# Altium PCB DoPro PCB.PcbDoc
Units mil, origin at the board's own origin, x right, y up, seen from the top; angles counter-clockwise.
Board outline 3495.51 x 2204.72 mil, 2 copper layers (Top Layer, Bottom Layer); 43 components, 31 nets, 155 pads, 59 vias.
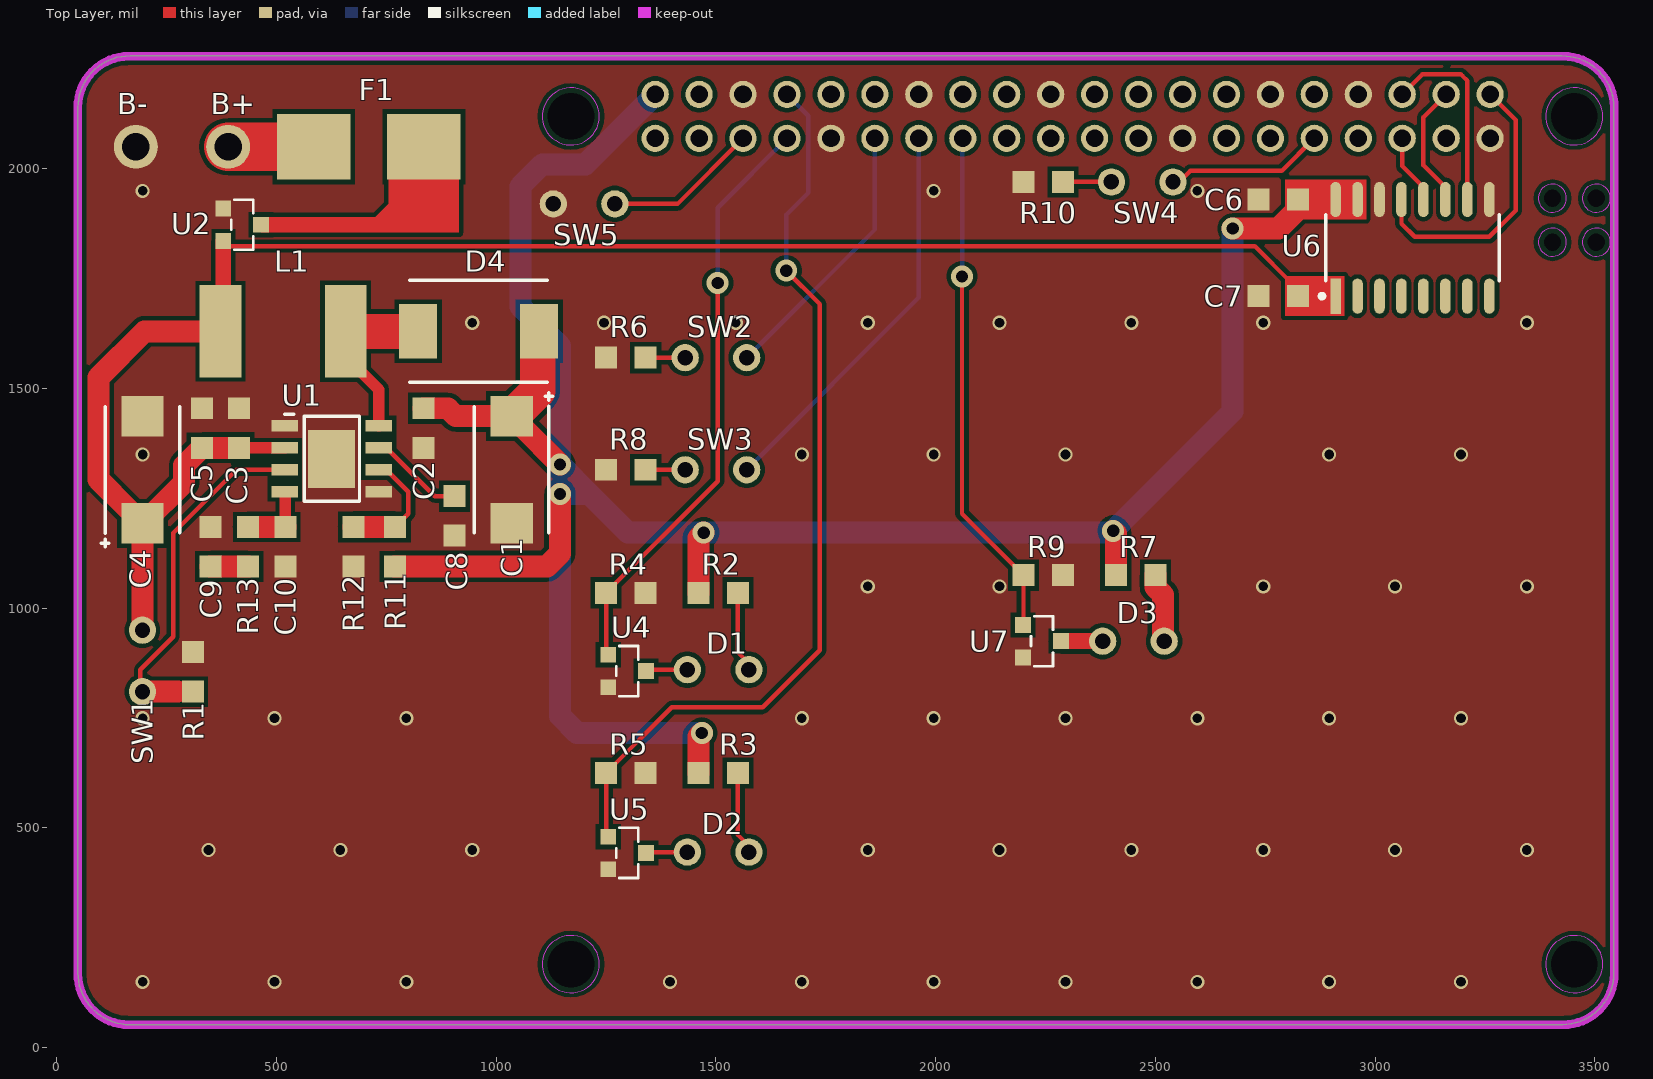
[diagram p0: Top Layer view]
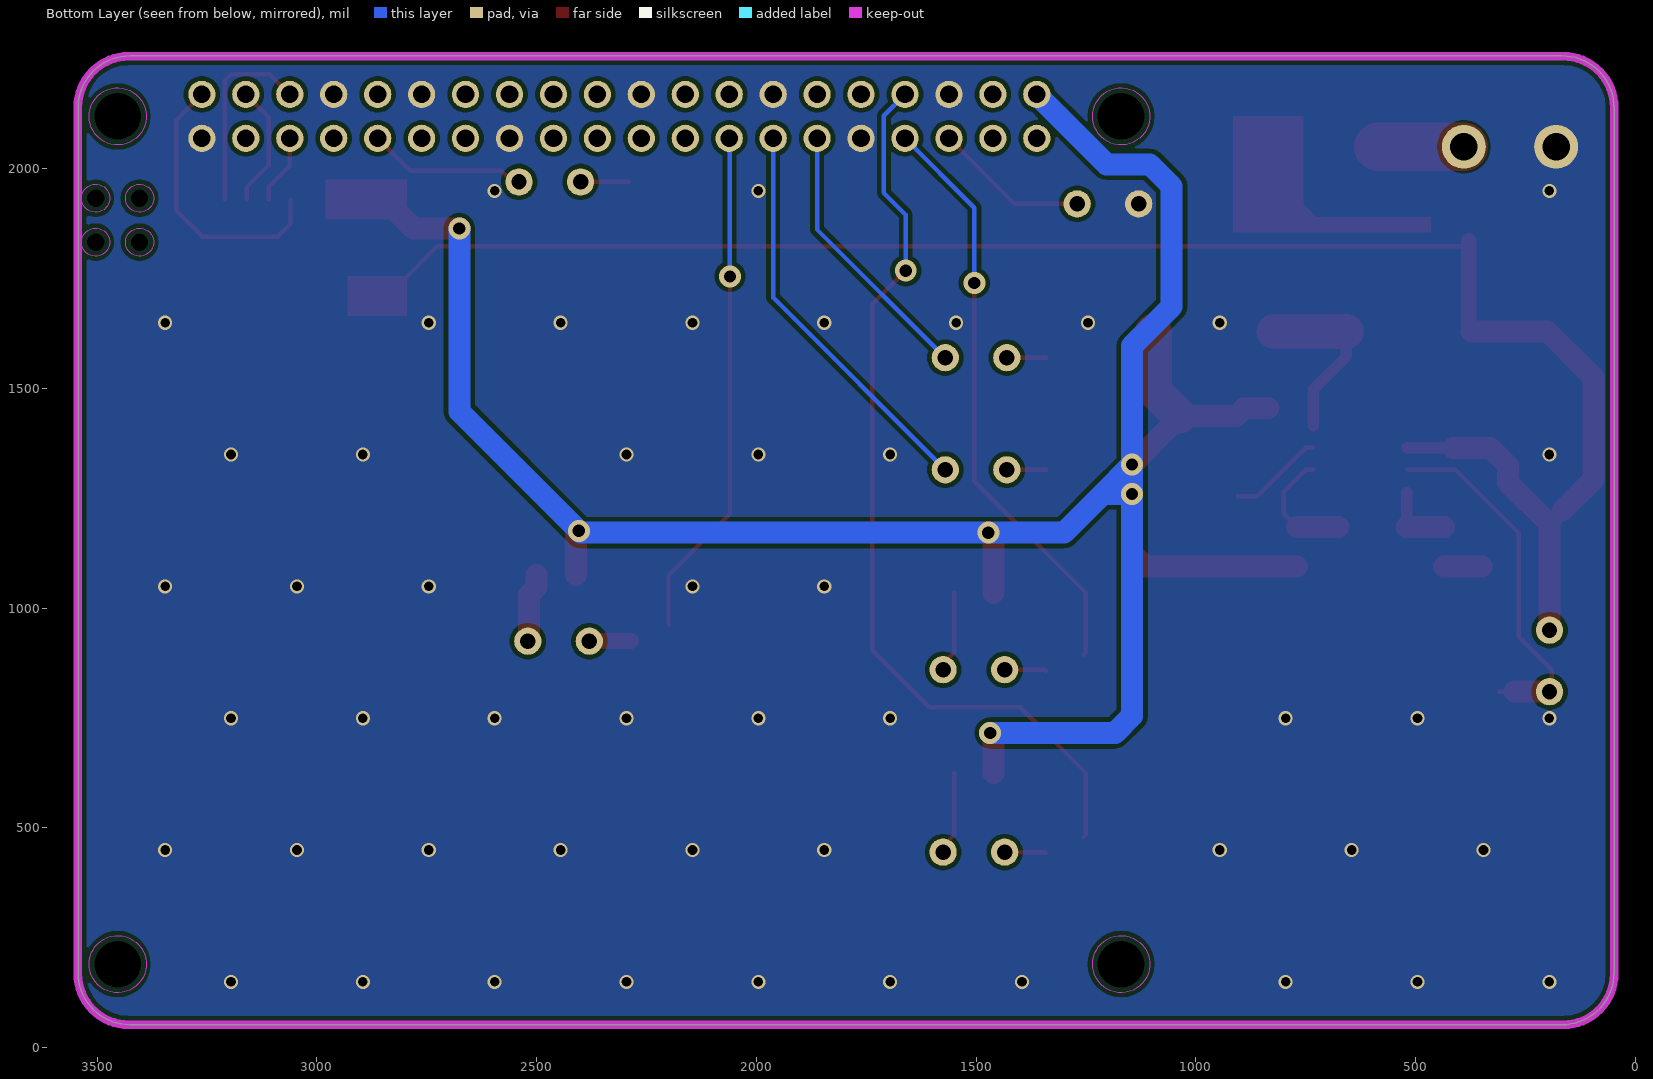
[diagram p1: Bottom Layer view, seen from below]

## Layer stack, top to bottom
Top Solder: solder mask 0.4, Solder Resist, Dk 3.5
Top Layer: signal copper 1.4
Dielectric 1: dielectric 12.6, FR-4, Dk 4.8
Bottom Layer: signal copper 1.4
Bottom Solder: solder mask 0.4, Solder Resist, Dk 3.5

## Board outline
47.95,170.31 47.95,2138.82 cw(c166.06,2138.82) 166.06,2256.93 3425.35,2256.93 cw(c3425.35,2138.82) 3543.46,2138.82 3543.46,170.31 cw(c3425.35,170.31) 3425.35,52.2 166.06,52.2 cw(c166.06,170.31)

## Design rules (kind name [scope] priority, off if disabled: settings)
Clearance [All] p1: gap=10 ignorepadtopadclearanceinfootprint=TRUE
HoleSize [All] p1: absolutevalues=TRUE maxlimit=200 minlimit=1 maxpercent=80.000 minpercent=20.000
PolygonConnect [All] p1: connectstyle=Direct reliefconductorwidth=10 reliefentries=4 polygonreliefangle="90 Angle" airgapwidth=10
RoutingVias [All] p1: holewidth=28 width=50 viastyle="Through Hole" minholewidth=22 minwidth=32 maxholewidth=28 maxwidth=50
SolderMaskExpansion SolderMaskExpansionVias [IsVia] p1: expansion=4 istentingtop=TRUE
SolderMaskExpansion [All] p2: expansion=4 istentingtop=FALSE
Width [All] p1: maxlimit=110 minlimit=5 preferedwidth=10
29 further rules are at their usual default settings.

## Classes and differential pairs
component class "DoPro Schematic": B+ B- C5 C6 C7 D1 D2 D3 F1 L1 R1 R2 R3 R4 R5 R6 R7 R8 R9 R10 SW1 SW2 SW3 SW4 SW5 U2 U4 U5 U6 U7

## Components (designator, comment, footprint, x,y, rotation, side; value= is the part's Value field where it differs from the comment)
B+ "Vbat+" Test_Point_100D#1 353.91,2050 r0 top (schematic designator TP1)
B- "Vbat-" Test_Point_100D#2 180,2055 r0 top (schematic designator TP2)
C1 "470uF" SMD_7343 1035,1315 r270 top
C2 "10uF" SMD_0805 835,1410 r270 top
C3 "1uF" SMD_0805 415,1410 r90 top
C4 "470uF" SMD_7343 195,1315 r90 top
C5 "10uF" SMD_0805 330,1410 r90 top
C6 "1uF" SMD_0805 2780,1930 r0 top
C7 "10uF" SMD_0805 2780,1710 r180 top
C8 "10nF" SMD_0805 905,1210 r270 top
C9 "2.2nF" SMD_0805 350,1140 r90 top
C10 "47pF" SMD_0805 520,1140 r270 top
D1 "GREEN_LED" Test_Point_2_62D 1505,860 r0 top
D2 "RED_LED" Test_Point_2_62D 1505,445 r0 top
D3 "MP-1616-1100-50-80" Test_Point_2_62D 2450,925 r0 top
D4 "Schottky_Diode" SMD_SMC_DO-214AB 960,1630 r180 top
F1 "01550900M" Littelfuse_154_OMNI-BLOK 710,2050 r0 top
L1 "1uH" Vishay_IHLP-3232DZ-11 515,1630 r0 top
R1 "1M" SMD_0805 310,855 r90 top
R2 "330" SMD_0805 1505,1035 r0 top
R3 "330" SMD_0805 1505,625 r0 top
R4 "2K" SMD_0805 1295,1035 r0 top
R5 "2K" SMD_0805 1295,625 r0 top
R6 "10K" SMD_0805 1295,1570 r0 top
R7 "12" SMD_0805 2455,1075 r0 top
R8 "10K" SMD_0805 1295,1315 r0 top
R9 "2K" SMD_0805 2245,1075 r0 top
R10 "10K" SMD_0805 2245,1970 r0 top
R11 "30.9K" SMD_0805 770,1140 r90 top
R12 "10K" SMD_0805 675,1140 r270 top
R13 "51K" SMD_0805 435,1140 r270 top
SW1 "Switch" Test_Point_2_62D 195,880 r270 top
SW2 "SEL1" Test_Point_2_62D 1500,1570 r0 top
SW3 "SEL2" Test_Point_2_62D 1500,1315 r0 top
SW4 "Capture" Test_Point_2_62D 2470,1970 r0 top
SW5 "Power Button" Test_Point_2_62D 1200,1920 r0 top
U1 "PAM2423AECADJR" SMD_SO-8EP 519.17,1415 r0 top
U2 "AO3415A" SMD_SOT-23 379,1909.5 r270 top
U3 "Raspberry Pi 4" RPI_Connections 1361.73,2069.13 r0 top
U4 "IRLML2803" SMD_SOT-23 1255,894 r270 top
U5 "IRLML2803" SMD_SOT-23 1255,480 r270 top
U6 "MCP3008" SMD_16-SOIC 3085,1820 r90 top
U7 "IRLML2803" SMD_SOT-23 2199,962 r270 top

## Footprints (in the part's own frame and the unit in brackets; to place one, negate y for a bottom-side part, rotate by r counter-clockwise, add the part's x,y. Pads: shape width x height; smd on the part's side, far side on the other; paste and mask are expansions set on the pad)
Littelfuse_154_OMNI-BLOK [mil]
  rect 167x150 smd: 1(-125.5,0) 2(125.5,0)
RPI_Connections [mil]
  round 62 hole 40.16: 1(0,0) 2(0,100) 3(100,0) 4(100,100) 5(200,0) 6(200,100) 7(300,0) 8(300,100) 9(400,0) 10(400,100) 11(500,0) 12(500,100) 13(600,0) 14(600,100) 15(700,0) 16(700,100) 17(800,0) 18(800,100) 19(900,0) 20(900,100) 21(1000,0) 22(1000,100) 23(1100,0) 24(1100,100) 25(1200,0) 26(1200,100) 27(1300,0) 28(1300,100) 29(1400,0) 30(1400,100) 31(1500,0) 32(1500,100) 33(1600,0) 34(1600,100) 35(1700,0) 36(1700,100) 37(1800,0) 38(1800,100) 39(1900,0) 40(1900,100)
SMD_16-SOIC [mil]
  rect 80x24 smd: 1(-110,175)
  oval 80x24 smd: 2(-110,125) 3(-110,75) 4(-110,25) 5(-110,-25) 6(-110,-75) 7(-110,-125) 8(-110,-175) 9(110,-175) 10(110,-125) 11(110,-75) 12(110,-25) 13(110,25) 14(110,75) 15(110,125) 16(110,175)
  silkscreen extent -116,-197 75,212
SMD_0805 [mil]
  rect 50x50 smd: 1(-45,0) 2(45,0)
SMD_7343 [mm]
  rect 2.35x2.45 smd: 1(-3.1,0) 2(3.1,0)
  silkscreen extent -4.46,-2.15 3.65,2.38, body extent -3.59,-2.21 3.6,2.21, height 2.92
SMD_SMC_DO-214AB [mm]
  rect 2.2x3.15 smd: 1(-3.5,0) 2(3.5,0)
  silkscreen extent -3.97,-2.95 3.97,2.95, body extent -3.97,-2.95 3.97,2.95, height 2.62
SMD_SO-8EP [mm]
  rect 1.525x0.65 smd: 1(0,0) 2(0,-1.27) 3(0,-2.54) 4(0,-3.81) 5(5.424,-3.81) 6(5.424,-2.54) 7(5.424,-1.27) 8(5.424,0)
  rect 2.71x3.35 smd: 9(2.688,-1.905)
  silkscreen extent 0,-4.36 4.31,0.67, body extent -0.29,-4.36 5.71,0.55, height 1.75
SMD_SOT-23 [mil]
  rect 36x36 smd: 1(0,0) 2(74,0) 3(37,86)
  silkscreen extent -20,18 94,68
Test_Point_2_62D [mil]
  round 62 hole 35: 1(-70,0) 2(70,0)
Test_Point_100D#1 [mil]
  round 100 hole 62: 1(36.09,0)
Test_Point_100D#2 [mil]
  round 100 hole 62: 1(0,-5)
Vishay_IHLP-3232DZ-11 [mil]
  rect 95x210 smd: 1(-142.5,0) 2(142.5,0)

## Part data
B+ B-: library part Test_Point
C1 C4: library part Capacitor_Polarized
C2 C3 C5 C6 C7 C8 C9 C10: library part Capacitor
D1 D2 D3: library part LED
F1: library part Fuse_ZAYA, "Holder: 01550900M        Fuse: 0454005.MR", Rating=5A
L1: library part Inductor, "IHLP3232DZER1R0M11"
R1 R2 R3 R4 R5 R6 R7 R8 R9 R10 R11 R12 R13: library part RESISTOR_4_DOUG
  R7: P/N=ERJ-P06J120V
SW2 SW3 SW4 SW5: library part Button
U2: library part AO3415A_ZAYA
U4 U5 U7: library part IRLML2803_ZAYA
U6: library part MCP3008_ZAYA

## Free pads (board coordinates)
  round 60 hole 106.3 unplated: 1(1170,190) 1(1170,2119.13) 1(3453.46,190) 1(3453.46,2119.13)
  round 30 hole 39.37 unplated: 1(3403.46,1832.91) 1(3403.46,1932.91) 1(3503.46,1832.91) 1(3503.46,1932.91)

## Via types
v1: diameter 32, hole 22, Top Layer to Bottom Layer, tented both sides, 50 vias
v2: diameter 50, hole 28, Top Layer to Bottom Layer, tented both sides, 9 vias

## Nets (pads, with @x,y where several pads share a name; then routed paths per layer and width w, separated by ;. In a path a pad name is that pad's centre, name@x,y a point inside that pad or via, vN(x,y) a via of type N, cw(c..) or ccw(c..) an arc to the next point about the centre after c; other vN are vias at no path point)
3V6: C3.1 C4.1 C5.1 C7.1 L1.1 SW1.1 U1.2 U2.2 U6.1 | length 4030.8
  Top Layer w10: U2.2@379,1824 2726,1824 2810,1740
  Top Layer w25.5: C3.1 U1.2
  Top Layer w36: C4.1@164.77,1223.18 164.77,1221.21 193.03,1192.95 C4.1 ; L1.1 379,1636.5 379,1824 U2.2
  Top Layer w50: C4.1@164.77,1223.18 95,1292.95 95,1525 200,1630 L1.1 ; SW1.1 C4.1 196.97,1192.95 290,1285.98 290,1325 C5.1 C3.1
5V1: C1.1 C2.1 C6.2 D4.1 R2.1 R3.1 R7.1 R11.1 U3.2 U6.15 U6.16 | length 5773.1
  Top Layer w50: R11.1 1115.71,1095 1145,1124.29 v2(1145,1260) ; C2.1 890,1455 907.95,1437.05 C1.1 1036.97,1437.05 1058.23,1415.79 1058.23,1413.82 v2(1145,1327.05) ; R3.1 1460,708 v2(1468,716) ; R2.1 1460,1160 v2(1472,1172) ; v2(2404,1176) 2410,1170 R7.1 ; v2(2676,1864) 2780,1864 2820,1904
  Top Layer w80: C1.1@1036.97,1437.05 1094.49,1494.57 1094.49,1626.69 D4.1
  Bottom Layer w50: U3.2 1361.73,2168.74 1202.99,2010 1105,2010 1055,1960 1055,1686.69 1145,1596.69 v2(1145,1327.05) ; v2(1468,716) 1184,716 1145,755 v2(1145,1260) ; v2(2676,1864) 2676,1448 v2(2404,1176) 2400,1172 v2(1472,1172) 1300.05,1172 1212.05,1260 ; v2(1145,1260) v2(1145,1327.05) ; v2(1145,1260) 1212.05,1260 ; v2(1145,1327.05) 1212.05,1260
Capture: SW4.2 U3.31 | length 362.8
  Top Layer w10: SW4.2 2554.07,1970 2579.07,1995 2787.6,1995 U3.31
CS: U3.36 U6.10 | length 443.5
  Top Layer w10: U3.36 3107.6,2215 3155,2215 cw(c3158.5,2169.13) 3159.88,2215.11 ccw(c3160.12,2225.11) 3160.36,2215.11 cw(c3161.73,2169.13) 3164.97,2215.02 ccw(c3165.59,2225) 3165.51,2215 3195,2215 3197.93,2212.07 3210,2200 U6.10
Flash: R9.1 U3.15 U7.1 | length 1166.3
  Top Layer w10: v2(2060,1755) 2060,1215 R9.1 2200,963 U7.1
  Bottom Layer w10: v2(2060,1755) 2060.87,1755.87 2060.87,2068.27 U3.15
LED1: R4.1 U3.7 U4.1 | length 1347.8
  Top Layer w10: U4.1 1250,899 R4.1 1504,1289 v2(1504,1740)
  Bottom Layer w10: v2(1504,1740) 1504,1911.4 U3.7
MISO: U3.35 U6.12 | length 159.1
  Top Layer w10: U3.35 3061.73,2006.27 3110,1958 U6.12
MOSI: U3.38 U6.11 | length 281.3
  Top Layer w10: U6.11 3160,1958 3110,2008 3110,2117.4 U3.38
NetC8_1: C8.1 U1.7 | length 217.8
  Top Layer w10: U1.7 749.94,1365 859.94,1255 C8.1
NetC9_1: C9.1 R13.2 | length 85
  Top Layer w50: C9.1 R13.2
NetC10_1: C10.1 R13.1 U1.4 | length 165.3
  Top Layer w10: U1.4 U1.4@520,1264.17
  Top Layer w25.5: C10.1 U1.4@520,1264.17
  Top Layer w50: R13.1 C10.1
NetD1_ANOD: D1.2 R2.2 | length 185.4
  Top Layer w10: R2.2 1550,899.07 1575,874.07 D1.2
NetD1_CATH: D1.1 U4.3 | length 95.2
  Top Layer w10: U4.3 1344,860 D1.1
NetD2_ANOD: D2.2 R3.2 | length 190.4
  Top Layer w10: R3.2 1550,484.07 1575,459.07 D2.2
NetD2_CATH: D2.1 U5.3 | length 94.8
  Top Layer w10: U5.3 1343,445 D2.1
NetD3_ANOD: D3.2 R7.2 | length 158.3
  Top Layer w50: R7.2 2500,1048.25 2517.7,1030.54 2517.7,927.3 D3.2
NetD3_CATH: D3.1 U7.3 | length 95
  Top Layer w36: U7.3 D3.1
NetD4_2: D4.2 L1.2 U1.8 | length 410.9
  Top Layer w25.5: L1.2 657.5,1572.5 732.72,1497.28 U1.8
  Top Layer w80: L1.2 D4.2
NetF1_2: F1.2 U2.3
NetR1_1: R1.1 SW1.2 U1.3 | length 837.2
  Top Layer w10: SW1.2 190,815 190,860 265,935 265,1171.21 408.79,1315 U1.3 ; 265,820 275,810 R1.1
  Top Layer w50: SW1.2 275,810
NetR6_2: R6.2 SW2.1 | length 90
  Top Layer w10: R6.2 SW2.1
NetR8_2: R8.2 SW3.1 | length 90
  Top Layer w10: R8.2 SW3.1
NetR10_2: R10.2 SW4.1 | length 110
  Top Layer w10: R10.2 SW4.1
NetR11_2: R11.2 R12.1 U1.6 | length 275.4
  Top Layer w10: U1.6 749.94,1315 800,1264.94 800,1215 R11.2
  Top Layer w50: R12.1 R11.2
Power: SW5.2 U3.5 | length 353.5
  Top Layer w10: SW5.2 1412.6,1920 U3.5
SCLK: U3.40 U6.13 | length 640.5
  Top Layer w10: U6.13 3060,1875 3090,1845 3260,1845 3320,1905 3320,2110.87 U3.40
SEL1: SW2.2 U3.11 | length 620
  Bottom Layer w10: SW2.2 1861.73,1861.73 U3.11
SEL2: SW3.2 U3.13 | length 916.4
  Bottom Layer w10: SW3.2 1961.73,1706.73 U3.13
StatusLED: R5.1 U3.8 U5.1 | length 2086
  Top Layer w10: U5.1 1250,485 R5.1 1399.5,774.5 1606.5,774.5 1736,904 1736,1692 v2(1660,1768)
  Bottom Layer w10: v2(1660,1768) 1660,1895 1710,1945 1710,2120.87 U3.8
Vbat+: B+.1 F1.1 | length 194.5
  Top Layer w110: B+.1 F1.1
Vbat-: B-.1 C1.2 C2.2 C3.2 C4.2 C5.2 C6.1 C7.2 C8.2 C9.2 C10.2 R1.2 R4.2 R5.2 R6.1 R8.1 R9.2 R10.1 R12.2 SW5.1 U1.1 U1.5 U1.9 U2.1 U3.6 U3.9 U3.14 U3.20 U3.25 U3.30 U3.34 U3.39 U4.2 U5.2 U6.9 U6.14 U7.2
  other v1: 195.43,149.57 495.43,149.57 795.43,149.57 1395.43,149.57 1695.43,149.57 1995.43,149.57 2295.43,149.57 2595.43,149.57 2895.43,149.57 3195.43,149.57 345.43,449.57 645.43,449.57 945.43,449.57 1845.43,449.57 2145.43,449.57 2445.43,449.57 2745.43,449.57 3045.43,449.57 3345.43,449.57 195.43,749.57 495.43,749.57 795.43,749.57 1695.43,749.57 1995.43,749.57 2295.43,749.57 2595.43,749.57 2895.43,749.57 3195.43,749.57 1845.43,1049.57 2145.43,1049.57 2745.43,1049.57 3045.43,1049.57 3345.43,1049.57 195.43,1349.57 1695.43,1349.57 1995.43,1349.57 2295.43,1349.57 2895.43,1349.57 3195.43,1349.57 945.43,1649.57 1245.43,1649.57 1545.43,1649.57 1845.43,1649.57 2145.43,1649.57 2445.43,1649.57 2745.43,1649.57 3345.43,1649.57 195.43,1949.57 1995.43,1949.57 2595.43,1949.57
pads on no net: U3.1 U3.3 U3.4 U3.10 U3.12 U3.16 U3.17 U3.18 U3.19 U3.21 U3.22 U3.23 U3.24 U3.26 U3.27 U3.28 U3.29 U3.32 U3.33 U3.37 U6.2 U6.3 U6.4 U6.5 U6.6 U6.7 U6.8

## Polygon pours and split planes (outlines as drawn)
Vbat- on Top Layer "VBAT-_L01_P000" (solid, pour order 0): 64,2256.93 67.88,2256.93 3543.46,2256.93 3543.46,51.79 51.98,63.97 47.97,2256.93 61.09,2256.93
Vbat- on Bottom Layer "VBAT-_L02_P002" (solid, pour order 2): 64.02,2244.96 67.9,2244.96 3543.49,2244.96 3543.49,39.82 52,52 47.99,2244.96 61.11,2244.96

## Keep-outs
Keep-Out Layer:
  circle w1: c1170,190 r65
  circle w1: c3503.46,1832.91 r32
  circle w1: c3403.46,1832.91 r32
  circle w1: c3503.46,1932.91 r32
  circle w1: c3403.46,1932.91 r32
  circle w1: c1170,2119.13 r65
  circle w1: c3453.46,2119.13 r65
  circle w1: c3453.46,190 r65
  lines w20: 48,168 ccw(c164,168) 164,52 3428,52 ccw(c3428,168) 3544,168 3544,2140 ccw(c3428,2140) 3428,2256 164,2256 ccw(c164,2140) 48,2140 48,168

## Other copper
Top Layer:
  region net NetF1_2: 755,1920 725,1890 735,1880 785,1880
  region net NetF1_2: 755,2120 915,2120 915,1855 755,1855 465,1855 465,1890 755,1890
  region net 5V1: 2980,1975 2980,1885 2795,1885 2795,1975
  region net 3V6: 2930,1755 2930,1665 2795,1665 2795,1755

## Silkscreen, mask and mechanical layers (free items; w line width, h text height)
Mechanical 1:
  circle w0.5: c1170,190 r53.15
  circle w0.5: c3403.46,1832.91 r19.68
  circle w0.5: c3503.46,1832.91 r19.68
  circle w0.5: c3503.46,1932.91 r19.68
  circle w0.5: c3403.46,1932.91 r19.68
  circle w0.5: c3453.46,190 r53.15
  circle w0.5: c2361.73,2069.13 r19.68
  circle w0.5: c2261.73,2069.13 r19.68
  circle w0.5: c2661.73,2069.13 r19.68
  circle w0.5: c2561.73,2069.13 r19.68
  circle w0.5: c2161.73,2069.13 r19.68
  circle w0.5: c2461.73,2069.13 r19.68
  circle w0.5: c1861.73,2069.13 r19.68
  circle w0.5: c1561.73,2069.13 r19.68
  circle w0.5: c1661.73,2069.13 r19.68
  circle w0.5: c1761.73,2069.13 r19.68
  circle w0.5: c1461.73,2069.13 r19.68
  circle w0.5: c1961.73,2069.13 r19.68
  circle w0.5: c2061.73,2069.13 r19.68
  circle w0.5: c1361.73,2069.13 r19.68
  circle w0.5: c2761.73,2169.13 r19.68
  circle w0.5: c2061.73,2169.13 r19.68
  circle w0.5: c1461.73,2169.13 r19.68
  circle w0.5: c1761.73,2169.13 r19.68
  circle w0.5: c1861.73,2169.13 r19.68
  circle w0.5: c1961.73,2169.13 r19.68
  circle w0.5: c1661.73,2169.13 r19.68
  circle w0.5: c1561.73,2169.13 r19.68
  circle w0.5: c1170,2119.13 r53.15
  circle w0.5: c2961.73,2069.13 r19.68
  circle w0.5: c3453.46,2119.13 r53.15
  circle w0.5: c3261.73,2069.13 r19.68
  circle w0.5: c3061.73,2069.13 r19.68
  circle w0.5: c3161.73,2069.13 r19.68
  circle w0.5: c2761.73,2069.13 r19.68
  circle w0.5: c2861.73,2069.13 r19.68
  circle w0.5: c1361.73,2169.13 r19.68
  circle w0.5: c2961.73,2169.13 r19.68
  circle w0.5: c2861.73,2169.13 r19.68
  circle w0.5: c2561.73,2169.13 r19.68
  circle w0.5: c2461.73,2169.13 r19.68
  circle w0.5: c2361.73,2169.13 r19.68
  circle w0.5: c2661.73,2169.13 r19.68
  circle w0.5: c2261.73,2169.13 r19.68
  circle w0.5: c2161.73,2169.13 r19.68
  circle w0.5: c3261.73,2169.13 r19.68
  circle w0.5: c3161.73,2169.13 r19.68
  circle w0.5: c3061.73,2169.13 r19.68
  lines w10: 47.95,170.31 ccw(c166.06,170.31) 166.06,52.2 3425.35,52.2 ccw(c3425.35,170.31) 3543.46,170.31 3543.46,2138.82 ccw(c3425.35,2138.82) 3425.35,2256.93 166.06,2256.93 ccw(c166.06,2138.82) 47.95,2138.82 47.95,170.31